# Altium PCB Jetson_AGX_M.2.PcbDoc
Units mil, origin at the board's own origin, x right, y up, seen from the top; angles counter-clockwise.
Board outline 866.14 x 1181.1 mil, 4 copper layers (Top Layer, GND 1, GND 2, Bottom Layer), stack 39.456 mil thick; 31 components, 23 nets, 174 pads, 70 vias.
Unrouted connection lines stored in the file: 2.
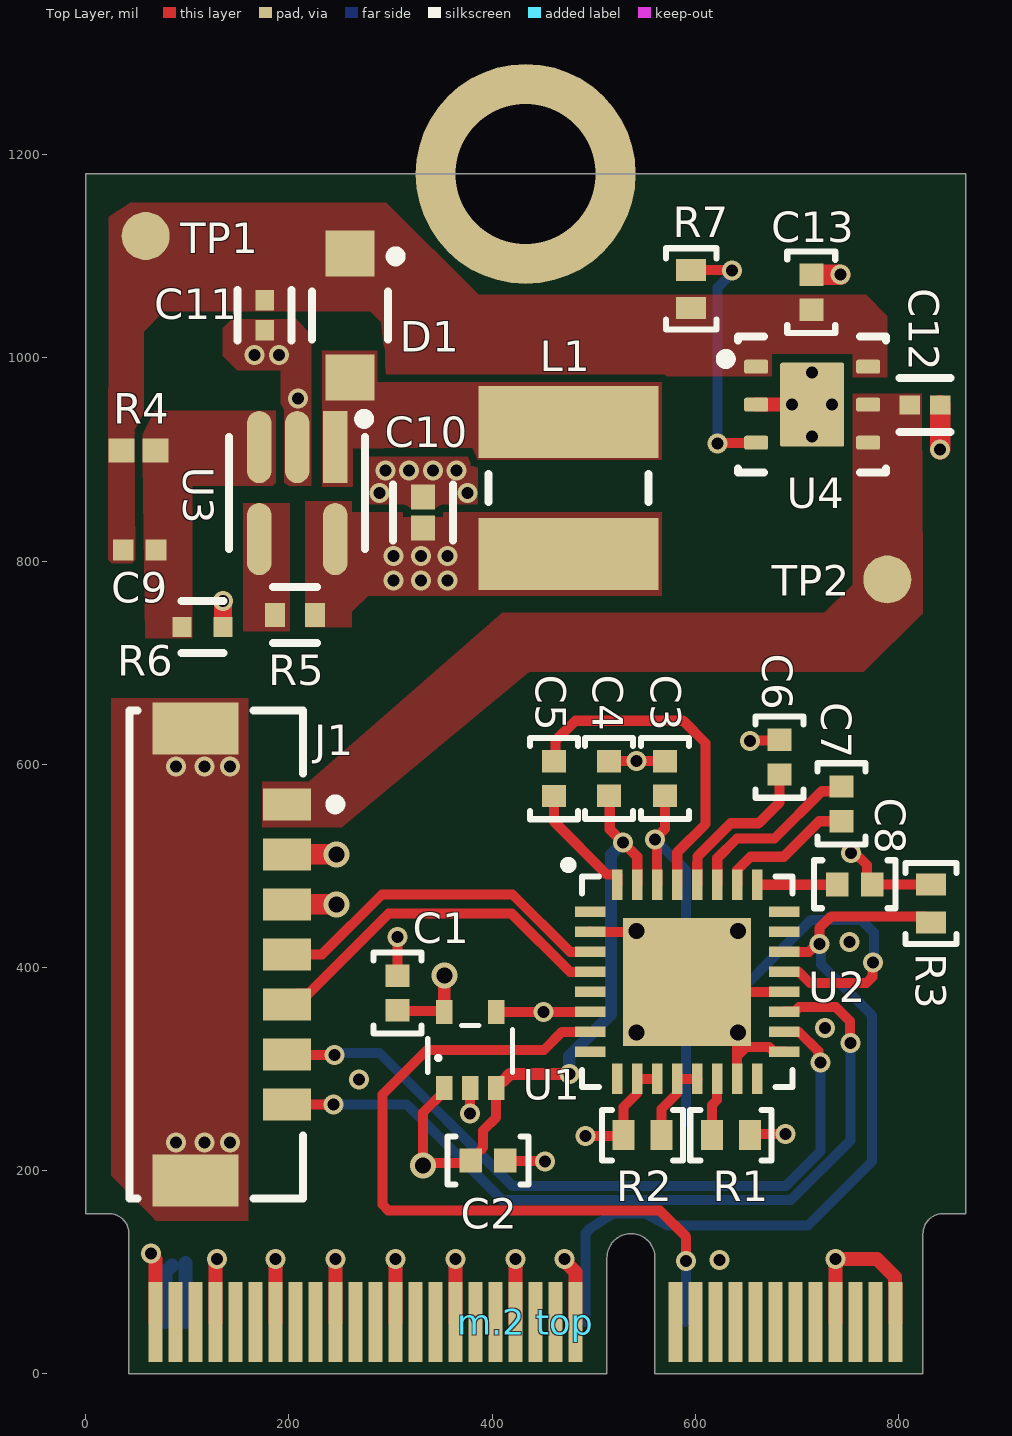
[diagram p0: Top Layer view]
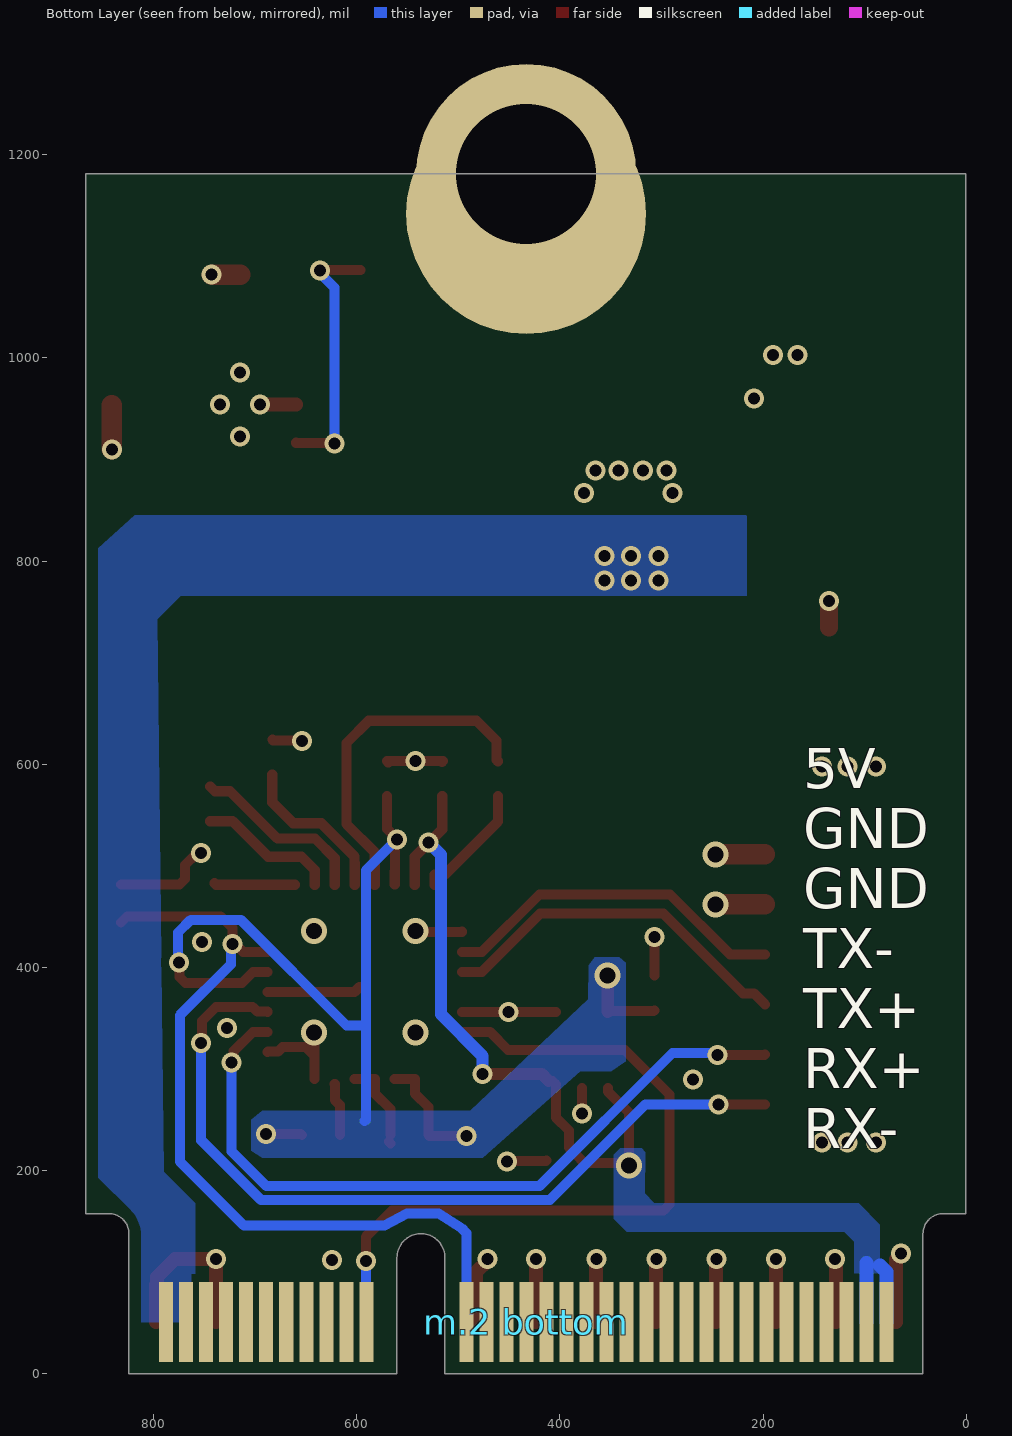
[diagram p1: Bottom Layer view, seen from below]
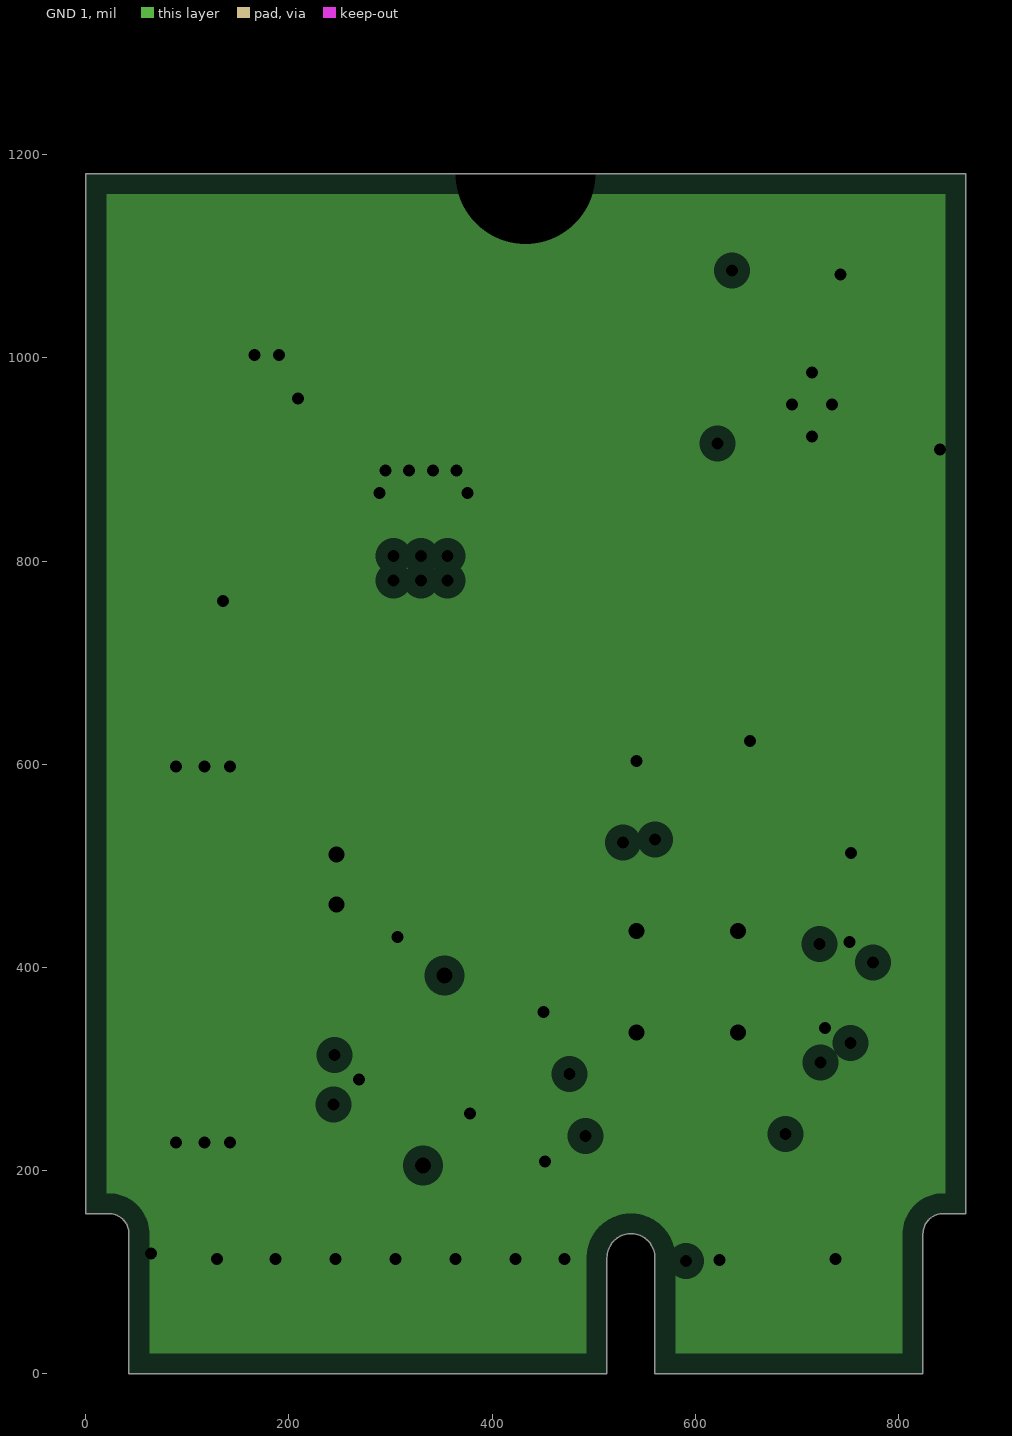
[diagram p2: GND 1, clearances drawn from the general rule]
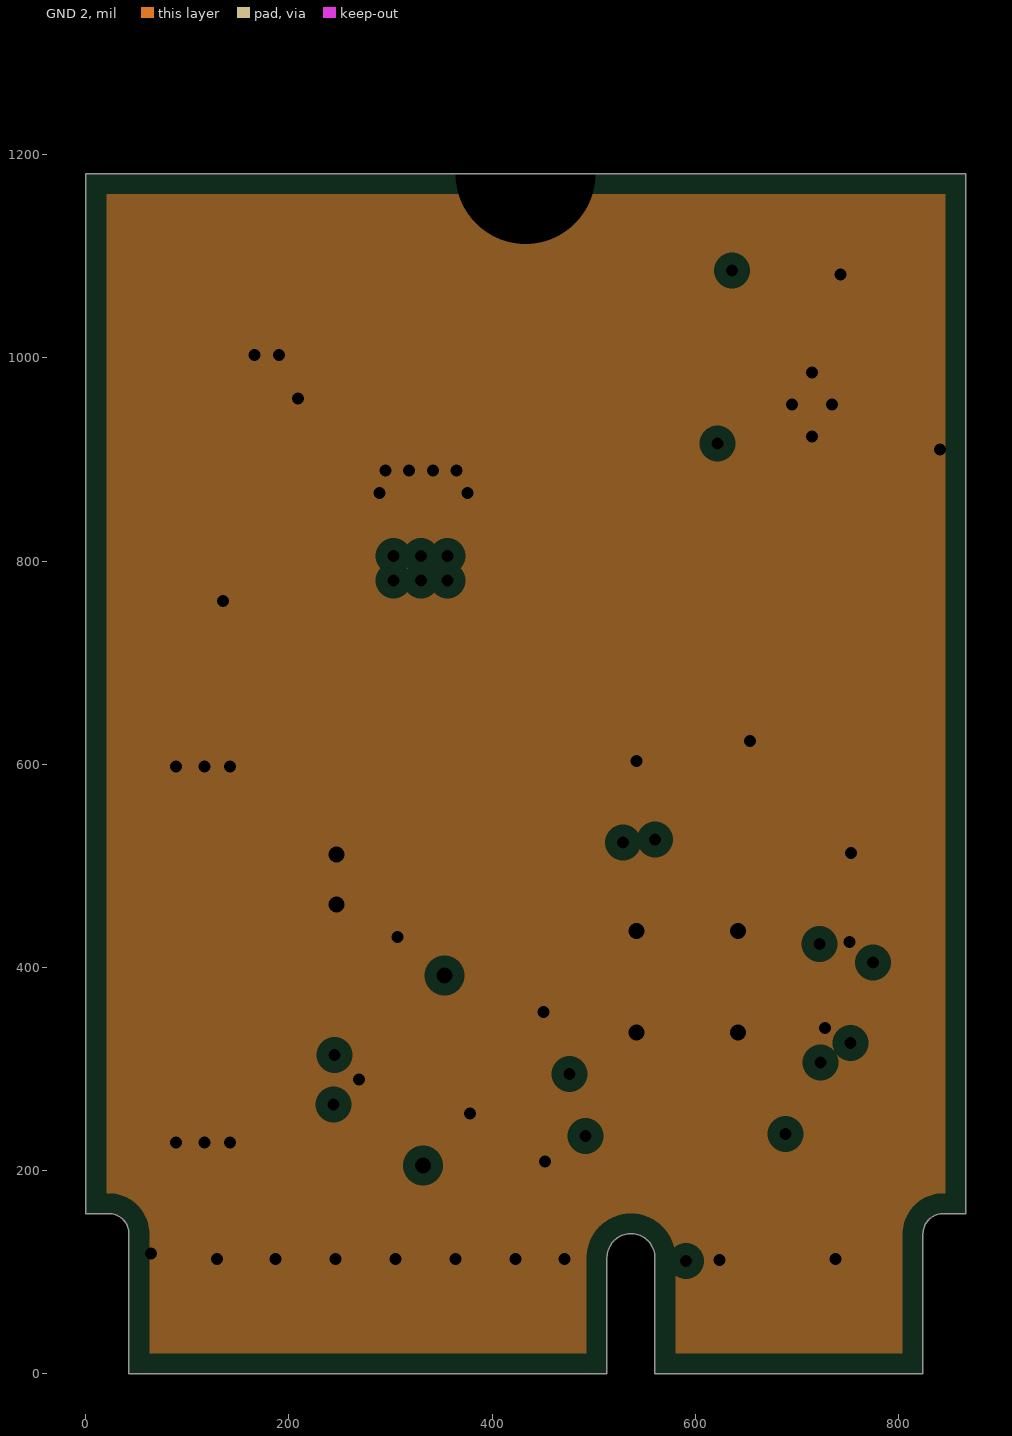
[diagram p3: GND 2, clearances drawn from the general rule]
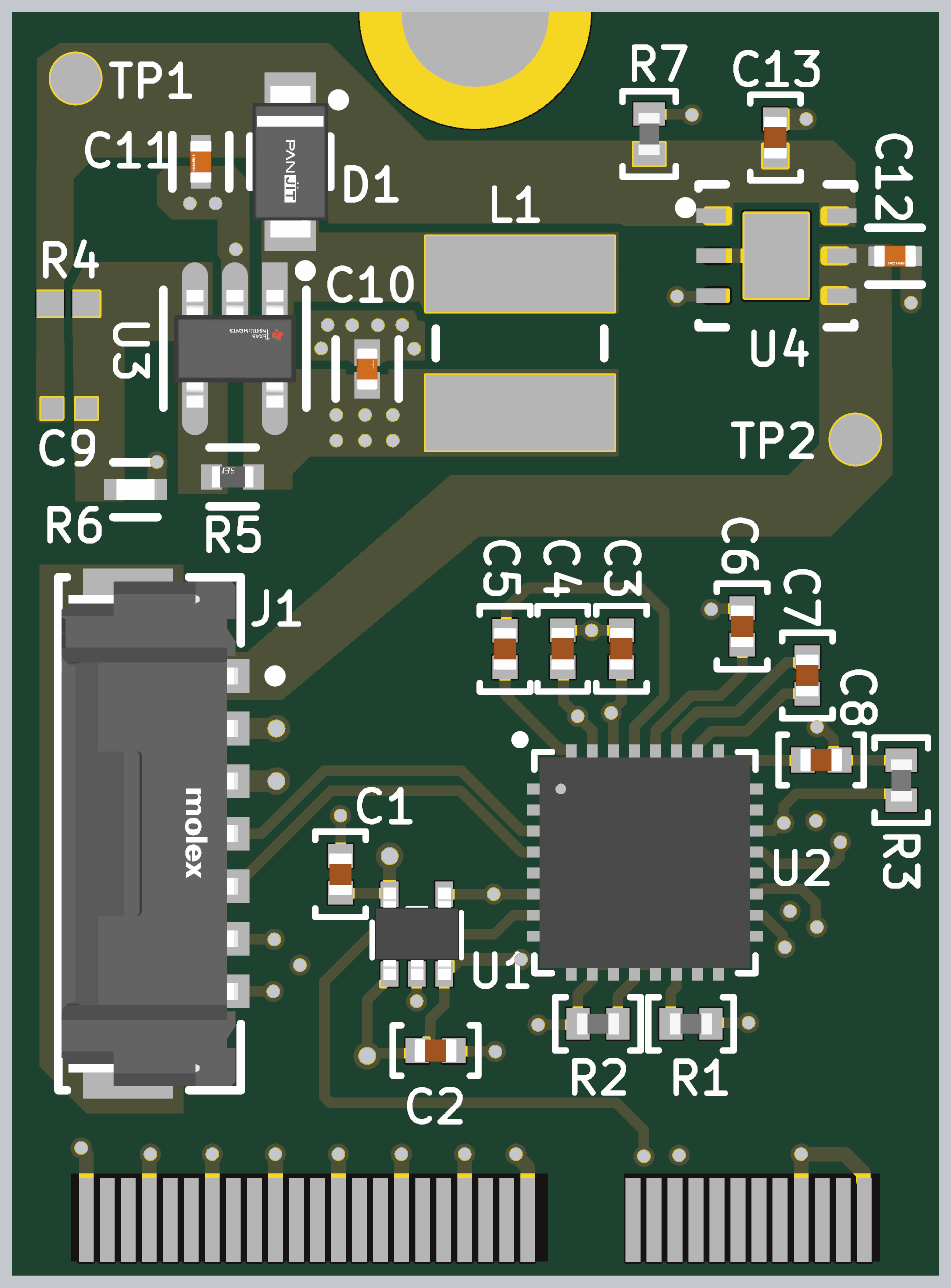
[diagram p4: 3D render of the assembled board from above, using the file's embedded part models]

## Layer stack, top to bottom
Top Solder: solder mask 0.4, Solder Resist, Dk 3.5
Top Layer: signal copper 1.4
Dielectric 2: prepreg 2.8, PP-006, Dk 4.1
GND 1: plane copper 1.378, net GND
Dielectric 1: dielectric 28.3, FR-4, Dk 4.8
GND 2: plane copper 1.378, net GND
Dielectric 3: prepreg 2.8, PP-006, Dk 4.1
Bottom Layer: signal copper 1.4
Bottom Solder: solder mask 0.4, Solder Resist, Dk 3.5

## Board outline
42.57,0.25 42.57,138.05 ccw(c22.89,138.05) 22.89,157.73 0.25,157.73 0.25,1181.35 866.39,1181.35 866.39,157.73 843.75,157.73 ccw(c843.75,138.05) 824.07,138.05 824.07,0.25 560.29,0.25 560.29,114.42 ccw(c536.67,114.42) 513.05,114.42 513.05,0.25

## Design rules (kind name [scope] priority, off if disabled: settings)
AcuteAngle [All] p1: minimum=8.00000000000000E+0001 checktracksonly=FALSE
BoardOutlineClearance "BoardOutlineClearance M.2" [(InComponent('m.2 top') OR InComponent('m.2 bottom'))] p1: gap=11.81 ignorepadtopadclearanceinfootprint=FALSE except(11.5: SMDPad-OutlineEdge)
BoardOutlineClearance "BoardOutlineClearance JLCPCB" [(Not OnSilkscreen) Or (Not IsComponentPrimitive)] p2: gap=11.81 ignorepadtopadclearanceinfootprint=FALSE
Clearance "Clearance JLCPCB 4 layer" [All] p1: gap=7.87 ignorepadtopadclearanceinfootprint=FALSE except(3.54: Arc-Arc Arc-Track Track-Track; 5: Arc-SMDPad Arc-Via Track-SMDPad Track-Via SMDPad-SMDPad; 9.45: THPad-THPad THPad-Via Via-Via; 10: Arc-Hole Track-Hole SMDPad-Hole THPad-Hole Via-Hole Fill-Hole Poly-Hole Region-Hole Text-Hole)
DiffPairsRouting "Diff Pairs USB 2.0" [InDifferentialPairClass('USB 2.0')] p1: maxlimit=5 minlimit=5 mostfreqgap=5 toplayer_minwidth=7.87 toplayer_maxwidth=7.87 toplayer_prefwidth=7.87 bottomlayer_minwidth=7.87 bottomlayer_maxwidth=7.87 bottomlayer_prefwidth=7.87 impedanceprofiledriven=TRUE maxuncoupledlength=500
DiffPairsRouting "Diff Pairs PCIe Gen 2" [InDifferentialPairClass('PCIe Gen 2')] p2: maxlimit=5 minlimit=5 mostfreqgap=5 toplayer_minwidth=5.53 toplayer_maxwidth=5.53 toplayer_prefwidth=5.53 bottomlayer_minwidth=5.53 bottomlayer_maxwidth=5.53 bottomlayer_prefwidth=5.53 impedanceprofiledriven=TRUE maxuncoupledlength=500
HoleSize "HoleSize JLCPCB Pad" [IsPad] p1: absolutevalues=TRUE maxlimit=248.03 minlimit=19.68 maxpercent=80.000 minpercent=20.000
HoleSize "HoleSize JLCPCB 4 layer Cheap" [All] p2: absolutevalues=TRUE maxlimit=248.03 minlimit=11.81 maxpercent=80.000 minpercent=20.000
HoleToHoleClearance "HoleToHoleClearance JLCPCB Same Net" [All] p1: gap=10 allowstackedmicrovias=TRUE
MinimumAnnularRing "MinimumAnnularRing JLCPCB Via" [All] p1: minimumring=2.95
MinimumAnnularRing "MinimumAnnularRing JLCPCB Pad" [IsPad] p2: minimumring=9.84
MinimumAnnularRing "MinimumAnnularRing JLCPCB 1oz" [All] p3: minimumring=5.12
MinimumSolderMaskSliver "MinimumSolderMaskSliver JLCPCB" [All] p1: minsoldermaskwidth=3.94
PlaneClearance [All] p1: clearance=11.81
PlaneConnect [All] p1: planeconnectstyle=Direct reliefexpansion=20 reliefentries=4 reliefconductorwidth=10 reliefairgap=10
PolygonConnect [All] p1: connectstyle=Direct reliefconductorwidth=15 reliefentries=4 polygonreliefangle="45 Angle" airgapwidth=10
RoutingVias "RoutingVias JLCPCB 4 layer" [All] p1: holewidth=19.68 width=39.37 viastyle="Through Hole" minholewidth=11.81 minwidth=17.72 maxholewidth=50 maxwidth=80 useviatemplates=TRUE viatemplateguid#1={2E508856-7BFB-429A-85BA-EE7E45057624} viatemplateguid#2={629F0BB4-9E32-4958-AA26-65C5A032447B} viatemplateguid#3={7A3A1E61-7EEF-4A61-ADD6-6F4DEF05B56F} viatemplatename#1=v50h30m0mx0(Tol13-8) viatemplatename#2=v65h40m0mx0(Tol13-8) viatemplatename#3=v80h50m0mx0(Tol13-8)
SilkToSilkClearance [All] p1: silktosilkclearance=3
SilkToSolderMaskClearance "SilkToSolderMaskClearance JLCPCB" [IsPad] p1: minsilkscreentomaskgap=5.91 clearancetoexposedcopper=TRUE
SolderMaskExpansion "SolderMaskExpansion JLCPCB" [All] p1: expansion=1.5 istentingtop=FALSE
UnRoutedNet [All] p1: checkbadconnections=TRUE
Width "Width JLCPCB 4 layer" [All] p1: maxlimit=196.85 minlimit=3.54 preferedwidth=9.84 minimp=50.000000 maximp=50.000000 favimp=50.000000
21 further rules are at their usual default settings.

## Classes and differential pairs
differential pair TR: +TR_P -TR_N
differential pair REC: +REC_P -REC_N

## Components (designator, comment, footprint, x,y, rotation, side; value= is the part's Value field where it differs from the comment)
C1 "1uF Ceramic 16V" CAPACITOR_0402 307,375 r90 top value=1uF
C2 "1uF Ceramic 16V" CAPACITOR_0402 396,210 r0 top value=1uF
C3 "100nF Ceramic 25V" CAPACITOR_0402 570,586.13 r90 top value=0.1uF
C4 "1uF Ceramic 16V" CAPACITOR_0402 515,586.13 r90 top value=1uF
C5 "100nF Ceramic 25V" CAPACITOR_0402 461,586 r90 top value=0.1uF
C6 "100nF Ceramic 25V" CAPACITOR_0402 683,607.13 r90 top value=0.1uF
C7 "100nF Ceramic 25V" CAPACITOR_0402 744,561.13 r270 top value=0.1uF
C8 "100nF Ceramic 25V" CAPACITOR_0402 757,482 r0 top value=0.1uF
C9 "470 pF" CAPC1005X55X25LL05T05 53,811 r180 top
C10 "2.2uF" FP-GRT155-0_2-IPC_C 332,848 r90 top
C11 "10 uF" FP-CL07-IPC_C 176.17,1042 r270 top
C12 "4.7 uF" FP-CL282-IPC_C 826.12,953.6 r0 top
C13 "1uF Ceramic 16V" CAPACITOR_0402 714.12,1064.6 r90 top value=1uF
D1 "MBR1020VL_R1_00001" FP-MBR1020VL_R1_00001-MFG 260,1042 r270 top
J1 "505567-0781" FP-505567-0781-MFG 128.36,413.03 r90 top
L1 "12uH" BOUR-SDR0403-2_V 475,872 r90 top
"m.2 bottom" "M.2 (BOTTOM)" "M.2 (bottom)" 787.4,51.18 r0 top
"m.2 top" "M.2 (TOP)" "M.2 (top)" 797.24,51.18 r0 top
R1 "0 Ohm 1% 1/16W" RESISTOR_0402 635,235 r0 top
R2 "0 Ohm 1% 1/16W" RESISTOR_0402 548,235 r180 top
R3 "10k Ohm 1% 1/16W" RESISTOR_0402 832,463 r90 top
R4 "75K" RESC1005X40X25NL10T10 52,909 r180 top
R5 "51K" FP-RMCF0402-MFG 206,747 r180 top
R6 "13.3K" FP-CR0402-MFG 115,735 r0 top
R7 "10k Ohm 1% 1/16W" RESISTOR_0402 596,1068 r90 top
TP1 "PCB Test Point" TESTPOINT_1.2MM 59,1120 r0 top
TP2 "PCB Test Point" TESTPOINT_1.2MM 789,782 r0 top
U1 "TLV70018DCKR" SOT-353 378.41,281.59 r0 top
U2 "SP335EER1-L" QFN-32 592,386 r0 top
U3 "LM27313XMF/NOPB" FP-DBV0005A-IPC_A 208.13,867 r270 top
U4 "LP38693SD-5.0/NOPB" NGG0006A_V 715,954 r0 top

## Footprints (in the part's own frame and the unit in brackets; to place one, negate y for a bottom-side part, rotate by r counter-clockwise, add the part's x,y. Pads: shape width x height; smd on the part's side, far side on the other; paste and mask are expansions set on the pad)
BOUR-SDR0403-2_V [mm] "SMD, 2-Leads, Dia 4.5mm, Height 3.5mm"
  rect 1.8x4.5 smd: 1(-1.65,0) 2(1.65,0)
  silkscreen extent -0.35,-2 0.35,2, body extent -2.25,-2 2.25,2, height 3.5
CAPACITOR_0402 [mm]
  rect 0.56x0.6 smd: 1(-0.435,0) 2(0.435,0)
  silkscreen extent -1.02,-0.6 1.02,0.6, body extent -0.5,-0.28 0.5,0.27, height 0.51
CAPC1005X55X25LL05T05 [mm] "Chip Capacitor, 2-Leads, Body 1.00x0.50mm, IPC High Density"
  rect 0.52x0.52 smd: 1(-0.41,0) 2(0.41,0)
  body extent -0.53,-0.28 0.53,0.28, height 0.55
FP-505567-0781-MFG [mm]
  rect 0.8x1.2 smd paste+0 mask+0: 1(3.75,-1.77) 2(2.5,-1.77) 3(1.25,-1.77) 4(0,-1.77) 5(-1.25,-1.77) 6(-2.5,-1.77) 7(-3.75,-1.77)
  rect 1.3x2.15 smd paste+0 mask+0: 8(-5.65,0.515) 9(5.65,0.515)
  silkscreen extent -6.1,-3.11 6.1,2.17, body extent -6.4,-2.48 6.4,2.27, height 0.25
FP-CL07-IPC_C [mil]
  rect 20.29x18.6 smd paste+0 mask+0: 1(-14.9,0) 2(14.9,0)
  silkscreen extent -25,-27 25,27, body extent -29,-15 29,15, height 10
FP-CL282-IPC_C [mil]
  rect 20.29x18.6 smd paste+0 mask+0: 1(-14.9,0) 2(14.9,0)
  silkscreen extent -25,-27 25,27, body extent -29,-15 29,15, height 10
FP-CR0402-MFG [mm]
  rect 0.475x0.5 smd paste+0 mask+0: 1(-0.512,0) 2(0.513,0)
  silkscreen extent -0.53,-0.65 0.53,0.65, body extent -0.85,-0.38 0.85,0.38, height 0.25
FP-DBV0005A-IPC_A [mm]
  rect 1.805x0.612 smd paste+0 mask+0: 1(-1.15,0.95)
  rrect100% 1.805x0.612 smd paste+0 mask+0: 2(-1.15,0) 3(-1.15,-0.95) 4(1.15,-0.95) 5(1.15,0.95)
  silkscreen extent -1.98,-1.7 1.4,1.8, body extent -2.55,-1.95 2.55,1.95, height 0.25
FP-GRT155-0_2-IPC_C [mil]
  rect 24.73x23.87 smd paste+0 mask+0: 1(-15.32,0) 2(15.31,0)
  silkscreen extent -28,-30 28,30, body extent -32,-18 32,18, height 10
FP-MBR1020VL_R1_00001-MFG [mm]
  rect 1.15x1.22 smd paste+0 mask+0: 1(-1.55,0) 2(1.55,0)
  silkscreen extent -1.6,-0.95 0.6,1.27, body extent -2.22,-1.05 2.22,1.05, height 0.25
FP-RMCF0402-MFG [mm]
  rect 0.5x0.6 smd paste+0 mask+0: 1(-0.5,0) 2(0.5,0)
  silkscreen extent -0.55,-0.7 0.55,0.7, body extent -0.85,-0.4 0.85,0.4, height 0.25
"M.2 (bottom)" [mm]
  rect 0.35x2 smd far side: 2(0,0) 4(-0.5,0) 6(-1,0) 8(-1.5,0) 10(-2.001,0) 12(-2.501,0) 14(-3.001,0) 16(-3.501,0) 18(-4.001,0) 20(-4.501,0) 22(-5.001,0) 32(-7.501,0) 34(-8.002,0) 36(-8.502,0) 38(-9.002,0) 40(-9.502,0) 42(-10.002,0) 44(-10.502,0) 46(-11.002,0) 48(-11.502,0) 50(-12.003,0) 52(-12.503,0) 54(-13.003,0) 56(-13.503,0) 58(-14.003,0) 60(-14.503,0) 62(-15.003,0) 64(-15.503,0) 66(-16.004,0) 68(-16.504,0) 70(-17.004,0) 72(-17.504,0) 74(-18.004,0)
"M.2 (top)" [mm] "M.2 E-Key Fingers on the top side"
  rect 0.35x2 smd: 1(0,0) 3(-0.5,0) 5(-1,0) 7(-1.5,0) 9(-2,0) 11(-2.5,0) 13(-3,0) 15(-3.5,0) 17(-4,0) 19(-4.5,0) 21(-5,0) 23(-5.5,0) 33(-8,0) 35(-8.5,0) 37(-9,0) 39(-9.5,0) 41(-10,0) 43(-10.5,0) 45(-11,0) 47(-11.5,0) 49(-12,0) 51(-12.5,0) 53(-13,0) 55(-13.5,0) 57(-14,0) 59(-14.5,0) 61(-15,0) 63(-15.5,0) 65(-16,0) 67(-16.5,0) 69(-17,0) 71(-17.5,0) 73(-18,0) 75(-18.5,0)
NGG0006A_V [mm] "SON, 6-Leads, Body 3x3 mm, Pitch 0.95mm, Full Paste, NSC Recommended"
  rrect29% 0.6x0.35 smd paste-0.175 mask+0.051: 1(-1.4,0.95) 2(-1.4,0) 3(-1.4,-0.95) 4(1.4,-0.95) 5(1.4,0) 6(1.4,0.95)
  rrect6% 1.6x2.1 smd paste-0.8 mask+0.051: 7(0,0)
  silkscreen extent -2.28,-1.7 1.85,1.7, body extent -1.55,-1.55 1.55,1.55, height 0.8
QFN-32 [mil]
  rect 30x10 smd paste+0 mask+0: 1(-95.5,68.9) 2(-95.5,49.21) 3(-95.5,29.53) 4(-95.5,9.84) 5(-95.5,-9.84) 6(-95.5,-29.53) 7(-95.5,-49.21) 8(-95.5,-68.9) 17(95.5,-68.9) 18(95.5,-49.21) 19(95.5,-29.53) 20(95.5,-9.84) 21(95.5,9.84) 22(95.5,29.53) 23(95.5,49.21) 24(95.5,68.9)
  rect 10x30 smd paste+0 mask+0: 9(-68.9,-95.5) 10(-49.21,-95.5) 11(-29.53,-95.5) 12(-9.84,-95.5) 13(9.84,-95.5) 14(29.53,-95.5) 15(49.21,-95.5) 16(68.9,-95.5) 25(68.9,95.5) 26(49.21,95.5) 27(29.53,95.5) 28(9.84,95.5) 29(-9.84,95.5) 30(-29.53,95.5) 31(-49.21,95.5) 32(-68.9,95.5)
  rect 126x126 smd paste-62.5 mask+0: 33(0,0)
  silkscreen extent -120,-104 104,118, body extent -99,-99 99,99, height 39
RESC1005X40X25NL10T10 [mm] "Chip Resistor, 2-Leads, Body 1.00x0.50mm, IPC Medium Density"
  rect 0.65x0.6 smd: 1(-0.425,0) 2(0.425,0)
  body extent -0.55,-0.3 0.55,0.3, height 0.4
RESISTOR_0402 [mm] "Resistor 0402"
  rect 0.55x0.75 smd: 1(-0.475,0) 2(0.475,0)
  silkscreen extent -1.02,-0.64 1.02,0.64, body extent -0.5,-0.25 0.5,0.25, height 0.25
SOT-353 [mm]
  rect 0.42x0.6 smd: 1(-0.65,0) 2(0,0) 3(0.65,0) 4(0.65,1.9) 5(-0.65,1.9)
  silkscreen extent -1.06,0.39 1.06,1.56, body extent -0.99,-0.14 1.01,2.06, height 0.96
TESTPOINT_1.2MM [mm]
  round 1.2 smd: TP(0,0)

## Part data
C1 C2 C4 C13: library part CAPACITOR_1uF_0402, "Cap 1uF 16V +/-10% / Ceramic 0402", Supplier Part Number 1=478-0402YD105KAT4ADKR-ND, Tolerance="+/- 10%", Voltage=16V, Made By="Robert Pafford", Supplier 1=Digi-Key
C3 C5 C6 C7 C8: library part CAPACITOR_0.1uF_0402, "Cap 100nF 25V +/-10% / Ceramic 0402", Supplier Part Number 1=478-7868-1-ND, Tolerance="+/- 10%", Voltage=25V, Made By="Robert Pafford", Supplier 1=Digi-Key
C9: library part CMP-2008-02039-1, Manufacturer=Vitramon, Part Number=VJ0402Y471KXQCW1BC
C10: library part CMP-06035-008228-1, "Multi-Layer Ceramic Capacitor 2.2uF 10V X6S ±10% 0402 Paper T/R", Case Code (Imperial)=0402, Case Code (Metric)=1005, Dielectric=X6S, Max Operating Temperature=105°C, Min Operating Temperature=-55°C, Ratings=AEC-Q200, Tolerance=10%, Voltage Rating=10V, Capacitance=2.2uF, Case/Package=0402, Length=0.039inch, Mount="Surface Mount", Packaging="Tape and Reel", Thickness=0.022inch, Voltage Rating (DC)=10V, Width=0.02inch
C11: library part CMP-13271-002778-1, "Cap Ceramic 10uF 10V X5R ±20% SMD 0402 +85°C Paper T/R", Capacitance=10uF, Case Code (Imperial)=0402, Case Code (Metric)=1005, Max Operating Temperature=85°C, Min Operating Temperature=-55°C, Tolerance=20%, Voltage Rating=10V, Case/Package=0402, Length=0.039inch, Mount="Surface Mount", Packaging="Tape and Reel", Thickness=0.035inch, Width=0.02inch
C12: library part CMP-13271-000548-1, "Cap Ceramic 4.7uF 10V X5R ±20% SMD 0402 +85°C Paper T/R", Capacitance=4.7uF, Case Code (Imperial)=0402, Case Code (Metric)=1005, Dielectric=X5R, Max Operating Temperature=85°C, Min Operating Temperature=-55°C, Package Quantity=10000, Tolerance=20%, Voltage Rating=10V, Case/Package=0402, Lead Free="Lead Free", Length=0.039inch, Mount="Surface Mount", Packaging="Tape and Reel", Thickness=0.022inch, Width=0.02inch
D1: library part CMP-34900-000005-1, "DIODE SCHOTTKY 20V 1A SOD123FL", RoHS Compliant=Yes
J1: library part CMP-00257-87166176-1, "505567-0781 Conn Shrouded Header (4 Sides) HDR 7 POS 1.25mm Solder RA Side Entry SMD Micro-Lock PLUS T/R", Manufacturer Lifecycle Status=ACTIVE, Contact Plating=Gold, Country of Origin=MY, Lifecycle Status=Production, NexarPartId=87166176, Number of Circuits=7, Number Of Rows=1, Orientation="Right Angle", Plating=Gold, RoHS=Compliant
L1: library part CMP-0904-00022-1, "SDR0403 Series Power Inductor, 12 uH +/- 20 %, 0.21 Ohm, -40 to 125 degC, 2-Pin SMD, RoHS, Tape and Reel", Inductance (uH)=12, Manufacturer=Bourns, PartNumber=SDR0403-120ML, Temperature Range="-40 to 125 degC", Test Frequency (MHz)=2.52, Tolerance (%)="+/- 20", ComponentLink1Description="Manufacturer URL", ComponentLink1URL=http://www.bourns.com/, ComponentLink2Description=Datasheet, ComponentLink2URL=http://www.bourns.com/data/global/pdfs/sdr0403.pdf, DatasheetVersion=Feb-12, I rms (A)="1.05 Max.", I sat (A)="1.6 Typ.", Mounting Technology="Surface Mount", PackageDescription="3-Pin SMD, Dia 4.5 mm, Height 3.5 mm", PackageReference=SDR0403-2, Packing="Tape and Reel", Q=28, RDC (Ohm)="0.21 Max.", RoHS=TRUE, SRF (MHz)="30 Min."
"m.2 top": "M.2 E-Key top fingers", Created By="Ethan Rosati"
R1 R2: library part RESISTOR_0_0402, "RES 0 OHM 1% 1/16W 0402", Supplier Part Number 1=13-AC0402FR-070RLCT-ND, Tolerance="+/- 1%", Value  (Ohms)=0, Made By="Robert Pafford", Supplier 1=Digikey, Wattage=1/16W
R3 R7: library part RESISTOR_10K_0402, "RES 10k OHM 1% 1/16W 0402", Digikey Part Numer=CR0603-JW-104ELFTR-ND, Supplier Part Number 1=YAG3436CT-ND, Tolerance="+/- 1%", Value  (Ohms)=10K, Made By="Robert Pafford", Supplier=Digikey, Supplier 1=Digi-Key, Wattage=1/16W
R4: library part CMP-2002-05825-1, Manufacturer=Panasonic, Part Number=ERA-2AEB753X
R5: library part CMP-26527-005598-1, "51kΩ ±5% 0.063W 0402 Thick Film Chip Resistor AEC-Q200 compliant", Case Code (Imperial)=0402, Case Code (Metric)=1005, Max Operating Temperature=155°C, Max Power Dissipation=63mW, Min Operating Temperature=-55°C, Resistance=51kR, Resistor Type="Thick Film", Temperature Coefficient=100ppm/°C, Tolerance=5%, Case/Package=0402, Contact Plating=Tin, Features="Automotive AEC-Q200", Height=0.016inch, Lead Free="Lead Free", Length=0.039inch, Mount="Surface Mount", Number of Terminations=2, Packaging="Tape and Reel", Power Rating=63mW, Radiation Hardening=No, RoHS Compliant=Yes, Series=RMCF, Size Code=0402, Width=0.02inch
R6: library part CMP-1011-00636-3, "Thick Film Chip Resistors 0402 13.3kΩ 0.0625W 1% 100ppm/°C", Case Code (Imperial)=0402, Case Code (Metric)=1005, Max Operating Temperature=125°C, Max Power Dissipation=63mW, Min Operating Temperature=-55°C, Package Quantity=10000, Power Rating=62.5mW, Resistance=13.3kR, Temperature Coefficient=100ppm/°C, Tolerance=1%, Voltage Rating=50V, Case/Package=0402, Composition="Thick Film", Contact Plating=Tin, Depth=0.5mm, Height=0.016inch, Length=0.039inch, Military Standard=Not, Mount="Surface Mount", Number of Terminations=2, Packaging="Tape and Reel", Radiation Hardening=No, Termination=SMD/SMT, Thickness=356um, Width=0.02inch
TP1 TP2: library part TESTPOINT, Made By="Robert Pafford"
U1: "Fixed Positive LDO Regulator, 1.8V, PMOS, PDSO5", Max Voltage="5.5 V", Min Voltage="2 V", Output Current="200 mA", Output Voltage="1.8 V", Supplier Part Number 1=595-TLV70018DCKR, Made By="Ethan Rosati", Supplier 1=Mouser
U2: "1/1, 2/2 Transceiver Full RS232, RS422, RS485 32-QFN (5x5)", Supplier Part Number 1=1016-1969-ND, Supply Voltage="3V - 5.5V", Created By="Ethan Rosati", Supplier 1=Digikey
U3: library part CMP-0069-01219-5, "IC REG BOOST ADJ 800MA SOT23-5", Case/Package=SOT-23-5, Max Input Voltage=14V, Max Operating Temperature=125°C, Max Output Current=800mA, Max Output Voltage=28V, Min Input Voltage=2.7V, Min Operating Temperature=-40°C, Min Output Voltage=4V, Output Power=2.5W, Package Quantity=1, Quiescent Current=2.1mA, Switching Frequency=1.6MHz, Contact Plating=Tin, Efficiency=80%, Height=1.02mm, Lead Free="Lead Free", Length=2.92mm, Mount="Surface Mount", Number of Outputs=1, Number of Pins=5, Output Configuration=Positive, Output Current=800mA, Output Type=Adjustable, Output Voltage=28V, Packaging="Tape and Reel", Radiation Hardening=No, REACH SVHC="No SVHC", RoHS Compliant=Yes, Series=LM27313, Synchronous Rectifier=No, Topology=Boost, Width=1.6mm
U4: library part CMP-0062-01512-4, "500mA Low Dropout CMOS Linear Regulators Stable with Ceramic Output Capacitors, 6-pin LLP, Pb-Free, 1000 Reel", Manufacturer="Texas Instruments", PackageTopMarking=ZXYTT*L131B, PowerWise=Y, ComponentLink1Description="Datasheet URL", ComponentLink1URL=http://www.ti.com/general/docs/lit/getliterature.tsp?genericPartNumber=LP38693&fileType=pdf, CompType="LDO IC", High-Reliability=Y, PackageDescription="LLP, Plastic, Dual, 3 x 3 x 0.8mm Body, 6 Lead, 0.95mm Pitch, No Pullback", PackageReference=NGG0006A, PartNumber=LP38693SD-5.0/NOPB, PinCount=6, RoHS=Y
"m.2 bottom": Created By="Ethan Rosati"

## Free pads (board coordinates)
  round 216.53 hole 137.79: 1(433.07,1181.1)
  round 236.22 smd far side: 2(433.07,1141.73)

## Via types
v1: diameter 19.68, hole 11.81, Top Layer to Bottom Layer, tented both sides, 62 vias
v2: diameter 25.59, hole 15.75, Top Layer to Bottom Layer, tented both sides, 8 vias

## Nets (pads, with @x,y where several pads share a name; then routed paths per layer and width w, separated by ;. In a path a pad name is that pad's centre, name@x,y a point inside that pad or via, vN(x,y) a via of type N, cw(c..) or ccw(c..) an arc to the next point about the centre after c; other vN are vias at no path point)
1V8: C1.1 C3.1 R1.2 R2.2 U1.5 U2.10 U2.11 U2.21 U2.30 | length 986.6
  Top Layer w9.84: C1.1 307.74,357.13 352.08,357.13 U1.5 U1.5@352.91,356.48 ; v2@352.91,391.91 v2(353,392) ; v1(492,234) 528.3,234 R2.2 529.3,262.67 542.71,276.08 542.71,290.42 U2.10 U2.11 U2.11@562.39,290.42 ; R1.2 654.7,236 v1(689,236) ; U2.21 687.58,395.76 701.92,395.76 712.77,384.92 768.44,384.92 774.2,390.68 774.2,404.2 v1(775,405)
  Top Layer w10: v1(560.4,526.1) 562.19,524.3 562.19,494.71 562.47,494.43 U2.30@562.47,481.78 ; v1@562.19,528.5 570,536.3 C3.1
  Top Layer w12: U1.5@352.91,356.48 v2@352.91,391.91
  Bottom Layer w9.84: v1(560.4,526.1) 591,495.5 591,343 ; 592,249 591,250 591,343 ; v1(775,405) 775.71,405.71 775.71,434.53 763.23,447 714,447 610,343 591,343
3V3: "m.2 bottom.2" "m.2 bottom.4" "m.2 bottom.72" "m.2 bottom.74" C2.1 C4.1 C10.1 L1.1 R5.1 U1.1 U1.3 U2.31 U3.5 | length 756.4
  Top Layer w9.84: v2(332,205) v2@334.31,207.31 ; U1.1 352.82,278.05 332,257.23 332,209.61 v2@334.31,207.31 ; U1.3 404,252.55 391,239.55 391,222.66 385.23,216.89 384.98,216.89 375.59,207.5 334.5,207.5 v2@334.31,207.31 ; U1.3@404,285.13 407.35,288.48 U1.3@410.89,288.48
  Top Layer w10: C4.1@515.79,569 515.79,536.21 542.79,509.21 U2.31
  Top Layer w12: U1.3@410.89,288.48 417.67,295.26 v1(476,295.26)
  Bottom Layer w9.84: 98,51.45 98.27,51.18
  Bottom Layer w10: 78,51.76 78.58,51.18
  Bottom Layer w12: v1(476,295.26) 476,313 517,354 517,510.98 v1(529.01,522.99)
  Bottom Layer w13.78: 78.58,51.18 78.58,100.29 85,106.71 ; 98,109 98.27,108.73 98.27,51.18
  other v1: 303,781 330,781 356,781 303,805 330,805 356,805
5V: C12.1 J1.1 TP2.TP U4.4 U4.5
8V: C9.2 C11.1 C13.1 D1.1 R4.2 R7.1 TP1.TP U4.1 U4.6
GND: "m.2 top.1" "m.2 top.7" "m.2 top.33" "m.2 top.39" "m.2 top.45" "m.2 top.51" "m.2 top.57" "m.2 top.63" "m.2 top.69" "m.2 top.75" C1.2 C2.2 C3.2 C4.2 C6.2 C8.2 C10.2 C11.2 C12.2 C13.2 J1.2 J1.3 J1.8 J1.9 pad.1 pad.2 R3.2 R6.2 U1.2 U1.4 U2.2 U2.6 U2.15 U2.17 U2.20 U2.33 U3.2 U4.2 U4.7 | length 1523.2
  Top Layer w9.84: C1.2 v1(307,430) ; v1(378.23,256.23) 378.32,256.32 378.32,281.5 U1.2 ; U1.4 v1(450.39,356.39) 496.42,356.39 U2.6 ; C2.2 413.63,209.5 451.5,209.5 v1(452,209) ; U2.2@496.42,435.29 U2.2 541.21,435.21 v2(542,436) ; C4.2@516.13,602.13 C4.2 v1(542,603.25) 567.75,603.25 C3.2@568.87,602.13 ; U2.33@596.92,381.08 601.84,376.16 U2.20 ; U2.15 641.21,312.86 ; v2(642,336) 641.21,335.21 641.21,312.86 ; v1(654,623) 654.63,623.63 682.37,623.63 C6.2 ; U2.17 687.42,317.18 677.42,317.18 672.74,321.87 650.22,321.87 641.21,312.86 ; C13.2 C13.2@714.26,1081.86 ; v1@742.86,1081.86 v1(743,1082) ; v1(753,513) 754.88,511.12 758.65,511.12 768.93,500.83 768.93,487.19 774.28,481.85 831.85,481.85 R3.2
  Top Layer w10: C3.2@568.87,602.13 C3.2
  Top Layer w12: v1(135,761) v1@135.09,760.91 ; R6.2@135.09,735.09 R6.2
  Top Layer w13.78: v1(64.23,118.77) 64.23,117.18 68.89,112.51 68.89,51.18 ; 127.95,51.18 127.95,110.95 v1@129,112 ; 187,51.18 v1(187,113) ; v1(246,113) 246.06,112.94 246.06,51.18 ; v1(305,113) 305.11,112.89 305.11,51.18 ; 364.17,51.18 v1@364.17,113 ; 423.22,51.18 v1(423.22,113) ; v1(471.25,113) 471.25,111.4 482.28,100.37 482.28,51.18 ; U4.2 v1(695.31,954) ; 738.19,51.18 v1(738.19,113) 778.82,113 796.34,95.48 796.34,88.6 797.24,87.7 797.24,51.18
  Top Layer w18: R6.2@135.09,735.09 v1@135.09,760.91
  Top Layer w20: J1.3 v2@241.46,462.24 ; J1.2 v2(247,511.46) ; C13.2@714.26,1081.86 v1@742.86,1081.86 ; v1(841,910) C12.2
  other v1: 624,112 129,113 364,113 89,228 117,228 142,228 269,290 727.82,340.41 752,425 89,598.06 117,598.06 142,598.06 288.92,867.3 376,867 294.92,889.3 318,889 342,889 364.92,889.3 715,922.5 734.68,954 209,960 715,985.5 166,1003 190,1003
  other v2: 542,336 642,436 247,462.24
NetC5_1: C5.1 U2.32 | length 119
  Top Layer w10: C5.1 461,543.6 513.1,491.5 523.1,491.5 U2.32
NetC5_2: C5.2 U2.29 | length 336.7
  Top Layer w10: C5.2 462.29,604.42 462.29,623.29 482,643 588,643 610,621 610,541.2 582.16,513.36 U2.29
NetC6_1: C6.1 U2.28 | length 158.3
  Top Layer w10: U2.28 601.84,502.84 602,503 602,509.21 634.79,542 662.34,542 683,562.66 C6.1
NetC7_1: C7.1 U2.27 | length 177.8
  Top Layer w10: U2.27 621.53,507.53 641,527 678,527 724.6,573.6 739.35,573.6 C7.1
NetC7_2: C7.2 U2.26 | length 137.1
  Top Layer w10: U2.26 641.21,495.96 654.26,509 687,509 722,544 C7.2
NetC8_1: C8.1 U2.25 | length 79.6
  Top Layer w10: U2.25 738.37,481.5 C8.1@739.87,483
NetC9_1: C9.1 R4.1 R6.1 U3.3
NetD1_2: D1.2 L1.2 U3.1
NetR1_1: R1.1 U2.14 | length 52.7
  Top Layer w9.84: R1.1 616.3,264.53 621.45,269.68 621.45,285.42 U2.14@621.53,285.5
NetR2_1: R2.1 U2.12 U2.13 | length 84.1
  Top Layer w9.84: R2.1@566.7,227 R2.1@568.37,228.67 ; R2.1 566.7,260.7 582.08,276.08 582.08,290.42 U2.12 U2.13 U2.13@601.92,290.42
NetR5_2: R5.2 U3.4
NetR7_2: R7.2 U4.3 | length 254.2
  Top Layer w9.84: R7.2 596.35,1086.35 635.65,1086.35 v1(636,1086) ; v1(622,916) 622.3,916.3 659.58,916.3 U4.3
  Bottom Layer w9.84: v1(622,916) 622,1069.34 636,1083.34 v1(636,1086)
REC_N: J1.7 U2.19 | length 808.2
  Top Layer w9.84: J1.7 v1(244,265.39) ; U2.19 687.58,356.55 697.58,356.55 702.26,361.24 738.32,361.24 752.09,347.47 752.09,326.51 v1(752.94,325.66)
  Bottom Layer w9.84: v1(244,265.39) 315.61,265.39 409.61,171.39 527.92,171.39 543.82,171.39 544.9,171.39 694.32,171.39 752.94,230.01 v1(752.94,325.66)
REC_P: J1.6 U2.18 | length 735.4
  Top Layer w9.84: J1.6 198.65,314 v1(245,314) ; U2.18 687.58,336.71 702.07,336.71 721.12,317.66 721.12,308.45 v1(723,306.57)
  Bottom Layer w9.84: v1(245,314) 246.88,315.88 289.12,315.88 420.23,184.77 508.42,184.77 519.5,184.77 530.59,184.77 539.35,184.77 550.44,184.77 561.53,184.77 688.77,184.77 723,219 v1(723,306.57)
TR_N: J1.4 U2.3 | length 346.3
  Top Layer w9.84: J1.4 232.52,413.03 291.49,472 420.11,472 476.58,415.53 U2.3
TR_P: J1.5 U2.4 | length 359.1
  Top Layer w9.84: J1.5 208.87,374.65 219.65,374.65 298,453 419.42,453 476.58,395.84 U2.4
UART_RX: "m.2 bottom.22" U2.7 | length 734.5
  Top Layer w9.84: U2.7 468.79,336.79 451,319 336,319 292,275 292,166.77 297.77,161 565,161 591,135 v1(591,111)
  Bottom Layer w9.84: 590.5,51.18 590.75,51.43 590.75,110.75 v1(591,111)
UART_TX: "m.2 bottom.32" R3.1 U2.22 | length 811.3
  Top Layer w9.84: U2.22 711.86,415.53 719.34,423 v1(722,423) 722,439 730,447 730.46,447 733.88,450.42 816.39,450.42 816.61,450.2 826.09,450.2 R3.1
  Bottom Layer w9.84: 492.07,51.18 492.07,85.63 492.07,138.84 496.62,143.38 519.5,158 522.38,158 538.28,158 550.44,158 572.64,146 575.13,146 711,146 774,209 774,353 723.88,403.12 723.88,421.12 v1(722,423)
pads on no net: "m.2 bottom.6" "m.2 bottom.8" "m.2 bottom.10" "m.2 bottom.12" "m.2 bottom.14" "m.2 bottom.16" "m.2 bottom.18" "m.2 bottom.20" "m.2 bottom.34" "m.2 bottom.36" "m.2 bottom.38" "m.2 bottom.40" "m.2 bottom.42" "m.2 bottom.44" "m.2 bottom.46" "m.2 bottom.48" "m.2 bottom.50" "m.2 bottom.52" "m.2 bottom.54" "m.2 bottom.56" "m.2 bottom.58" "m.2 bottom.60" "m.2 bottom.62" "m.2 bottom.64" "m.2 bottom.66" "m.2 bottom.68" "m.2 bottom.70" "m.2 top.3" "m.2 top.5" "m.2 top.9" "m.2 top.11" "m.2 top.13" "m.2 top.15" "m.2 top.17" "m.2 top.19" "m.2 top.21" "m.2 top.23" "m.2 top.35" "m.2 top.37" "m.2 top.41" "m.2 top.43" "m.2 top.47" "m.2 top.49" "m.2 top.53" "m.2 top.55" "m.2 top.59" "m.2 top.61" "m.2 top.65" "m.2 top.67" "m.2 top.71" "m.2 top.73" U2.1 U2.5 U2.8 U2.9 U2.16 U2.23 U2.24

## Polygon pours and split planes (outlines as drawn)
no net on Top Solder "soldermask begone (top)" (solid): 828,95 828,0 44,0 44,95
no net on Bottom Solder "NONET_L-01_P-001" (solid): 45,95 825,95 825,0 45,0
GND on Top Layer "NONET_L-01_P-001" (solid, pour order 48): 25,665 160,665 160,151 69,151 65,155 25,195
5V on Top Layer "5V_L01_P036" (solid, pour order 36): 755,965 823,965 823.94,748.94 766,691 606,691 573,691 436.53,691 252,538 174,538 174,583 219.44,583 410,749 562,749 727,749 755,777 755,887.95
3V3 on Top Layer "Top Layer-3V3" (solid, pour order 47): 216,735 262,735 262,750 278,766 567,766 567,848 262,848 262,859 216,859
8V on Top Layer "Top Layer-8V" (solid, pour order 46): 22,798 49,798 48,929 57,946 57,1026 77,1046 280,1046 291,1035 296,982 675,982 675,1004 755,1004 755,981 789,981 789,1041 768,1062 387,1062 296,1153 291,1153 43.99,1153 22.88,1138.92
GND on Top Layer "GND_L01_P024" (solid, pour order 24): 222,874 222,1023 207,1038 144,1038 135,1029 135,1002 149,988 192,988 192,874
NetR5_2 on Top Layer "NETR5_2_L01_P008" (solid, pour order 8): 155,857 155,731 201,731 201,857
NetD1_2 on Top Layer "NETD1_2_L01_P014" (solid, pour order 14): 233,1007 233,873 264,873 263,874 263,911 381.18,911 386,900 567,900 567,976 287,976 287,1007
NetC9_1 on Top Layer "NETC9_1_L01_P018" (solid, pour order 18): 105,724 58.64,724 56,900 56,925 68,948 187.18,948 187.18,877.18 184,874 105,874
GND on Top Layer "GND_L01_P013" (solid, pour order 13): 386,853 276,853 276,903 386,903
3V3 on Bottom Layer "3V3_L04_P039" (solid, pour order 39): 216,846 217,845 818.54,845 864.59,803.4 859.94,198.94 822,161 822,51 796,51 759,51 759,167.94 790,198.94 796,743 773,766 216,766
1V8 on Bottom Layer "1V8_L04_P040" (solid, pour order 40): 341.7,410 334.96,404.53 335.12,307.78 349.2,298 380,298 476,213 692.69,213 703.75,219.49 703.75,250.34 693.06,259 488.13,259 372,368.88 371.46,402.3 365.79,410
3V3 on Bottom Layer "3V3_L04_P044" (solid, pour order 44): 85,99 85,114.42 85,147 106,168 307,168 316.62,177.62 316,222 347,222 347,152.67 334.33,140 120,140 110,130 110,99
GND on GND 2 (split plane): 846.29,177.83 843.75,177.83 843.4,177.79 838.56,177.48 833.46,176.46 828.53,174.79 823.87,172.49 819.54,169.6 815.63,166.17 812.2,162.26 809.31,157.93 807.01,153.26 805.34,148.34 804.32,143.24 804.01,138.4 803.97,138.05 803.97,20.35 580.39,20.35 580.39,114.42 580.38,114.52 580.01,120.13 578.89,125.74 577.06,131.15 574.53,136.28 571.35,141.04 567.58,145.33 563.28,149.11 558.53,152.28 553.4,154.81 547.98,156.65 542.37,157.76 536.67,158.14 530.96,157.76 525.35,156.65 519.94,154.81 514.81,152.28 510.06,149.11 505.76,145.33 501.99,141.04 498.81,136.28 496.28,131.15 494.44,125.74 493.33,120.13 492.96,114.52 492.95,114.42 492.95,20.35 62.67,20.35 62.67,138.05 62.63,138.4 62.32,143.24 61.3,148.34 59.63,153.26 57.33,157.93 54.44,162.26 51.01,166.17 47.1,169.6 42.77,172.49 38.11,174.79 33.18,176.46 28.08,177.48 23.24,177.79 22.89,177.83 20.35,177.83 20.35,1161.26 846.29,1161.26
GND on GND 1 (split plane): 846.29,177.83 843.75,177.83 843.4,177.79 838.56,177.48 833.46,176.46 828.53,174.79 823.87,172.49 819.54,169.6 815.63,166.17 812.2,162.26 809.31,157.93 807.01,153.26 805.34,148.34 804.32,143.24 804.01,138.4 803.97,138.05 803.97,20.35 580.39,20.35 580.39,114.42 580.38,114.52 580.01,120.13 578.89,125.74 577.06,131.15 574.53,136.28 571.35,141.04 567.58,145.33 563.28,149.11 558.53,152.28 553.4,154.81 547.98,156.65 542.37,157.76 536.67,158.14 530.96,157.76 525.35,156.65 519.94,154.81 514.81,152.28 510.06,149.11 505.76,145.33 501.99,141.04 498.81,136.28 496.28,131.15 494.44,125.74 493.33,120.13 492.96,114.52 492.95,114.42 492.95,20.35 62.67,20.35 62.67,138.05 62.63,138.4 62.32,143.24 61.3,148.34 59.63,153.26 57.33,157.93 54.44,162.26 51.01,166.17 47.1,169.6 42.77,172.49 38.11,174.79 33.18,176.46 28.08,177.48 23.24,177.79 22.89,177.83 20.35,177.83 20.35,1161.26 846.29,1161.26

## Silkscreen, mask and mechanical layers (free items; w line width, h text height)
Bottom Overlay:
  text "5V / GND / GND / TX- / TX+ / RX+ / RX-" at 160.25,222.21 h39.37
Mechanical 1:
  lines w0.5: 0.25,157.73 0.25,1181.35 ; 42.57,138.05 42.57,0.25 513.05,0.25 ; 560.29,0.25 824.07,0.25 824.07,138.05

## Text inside footprints (layer, text, board x,y; h text height)
U2: Mechanical 13 "*" at 499,439.74 h50